# Altium PCB MOD-ADC-10.PCBDOC (part 3 of 4)
Units mm, origin at the board's own origin, x right, y up, seen from the top; angles counter-clockwise.
Board outline 80 x 100 mm, 4 copper layers (L1, P2, L3, L4), stack 1.512 mm thick; 199 components, 170 nets, 717 pads, 298 vias.
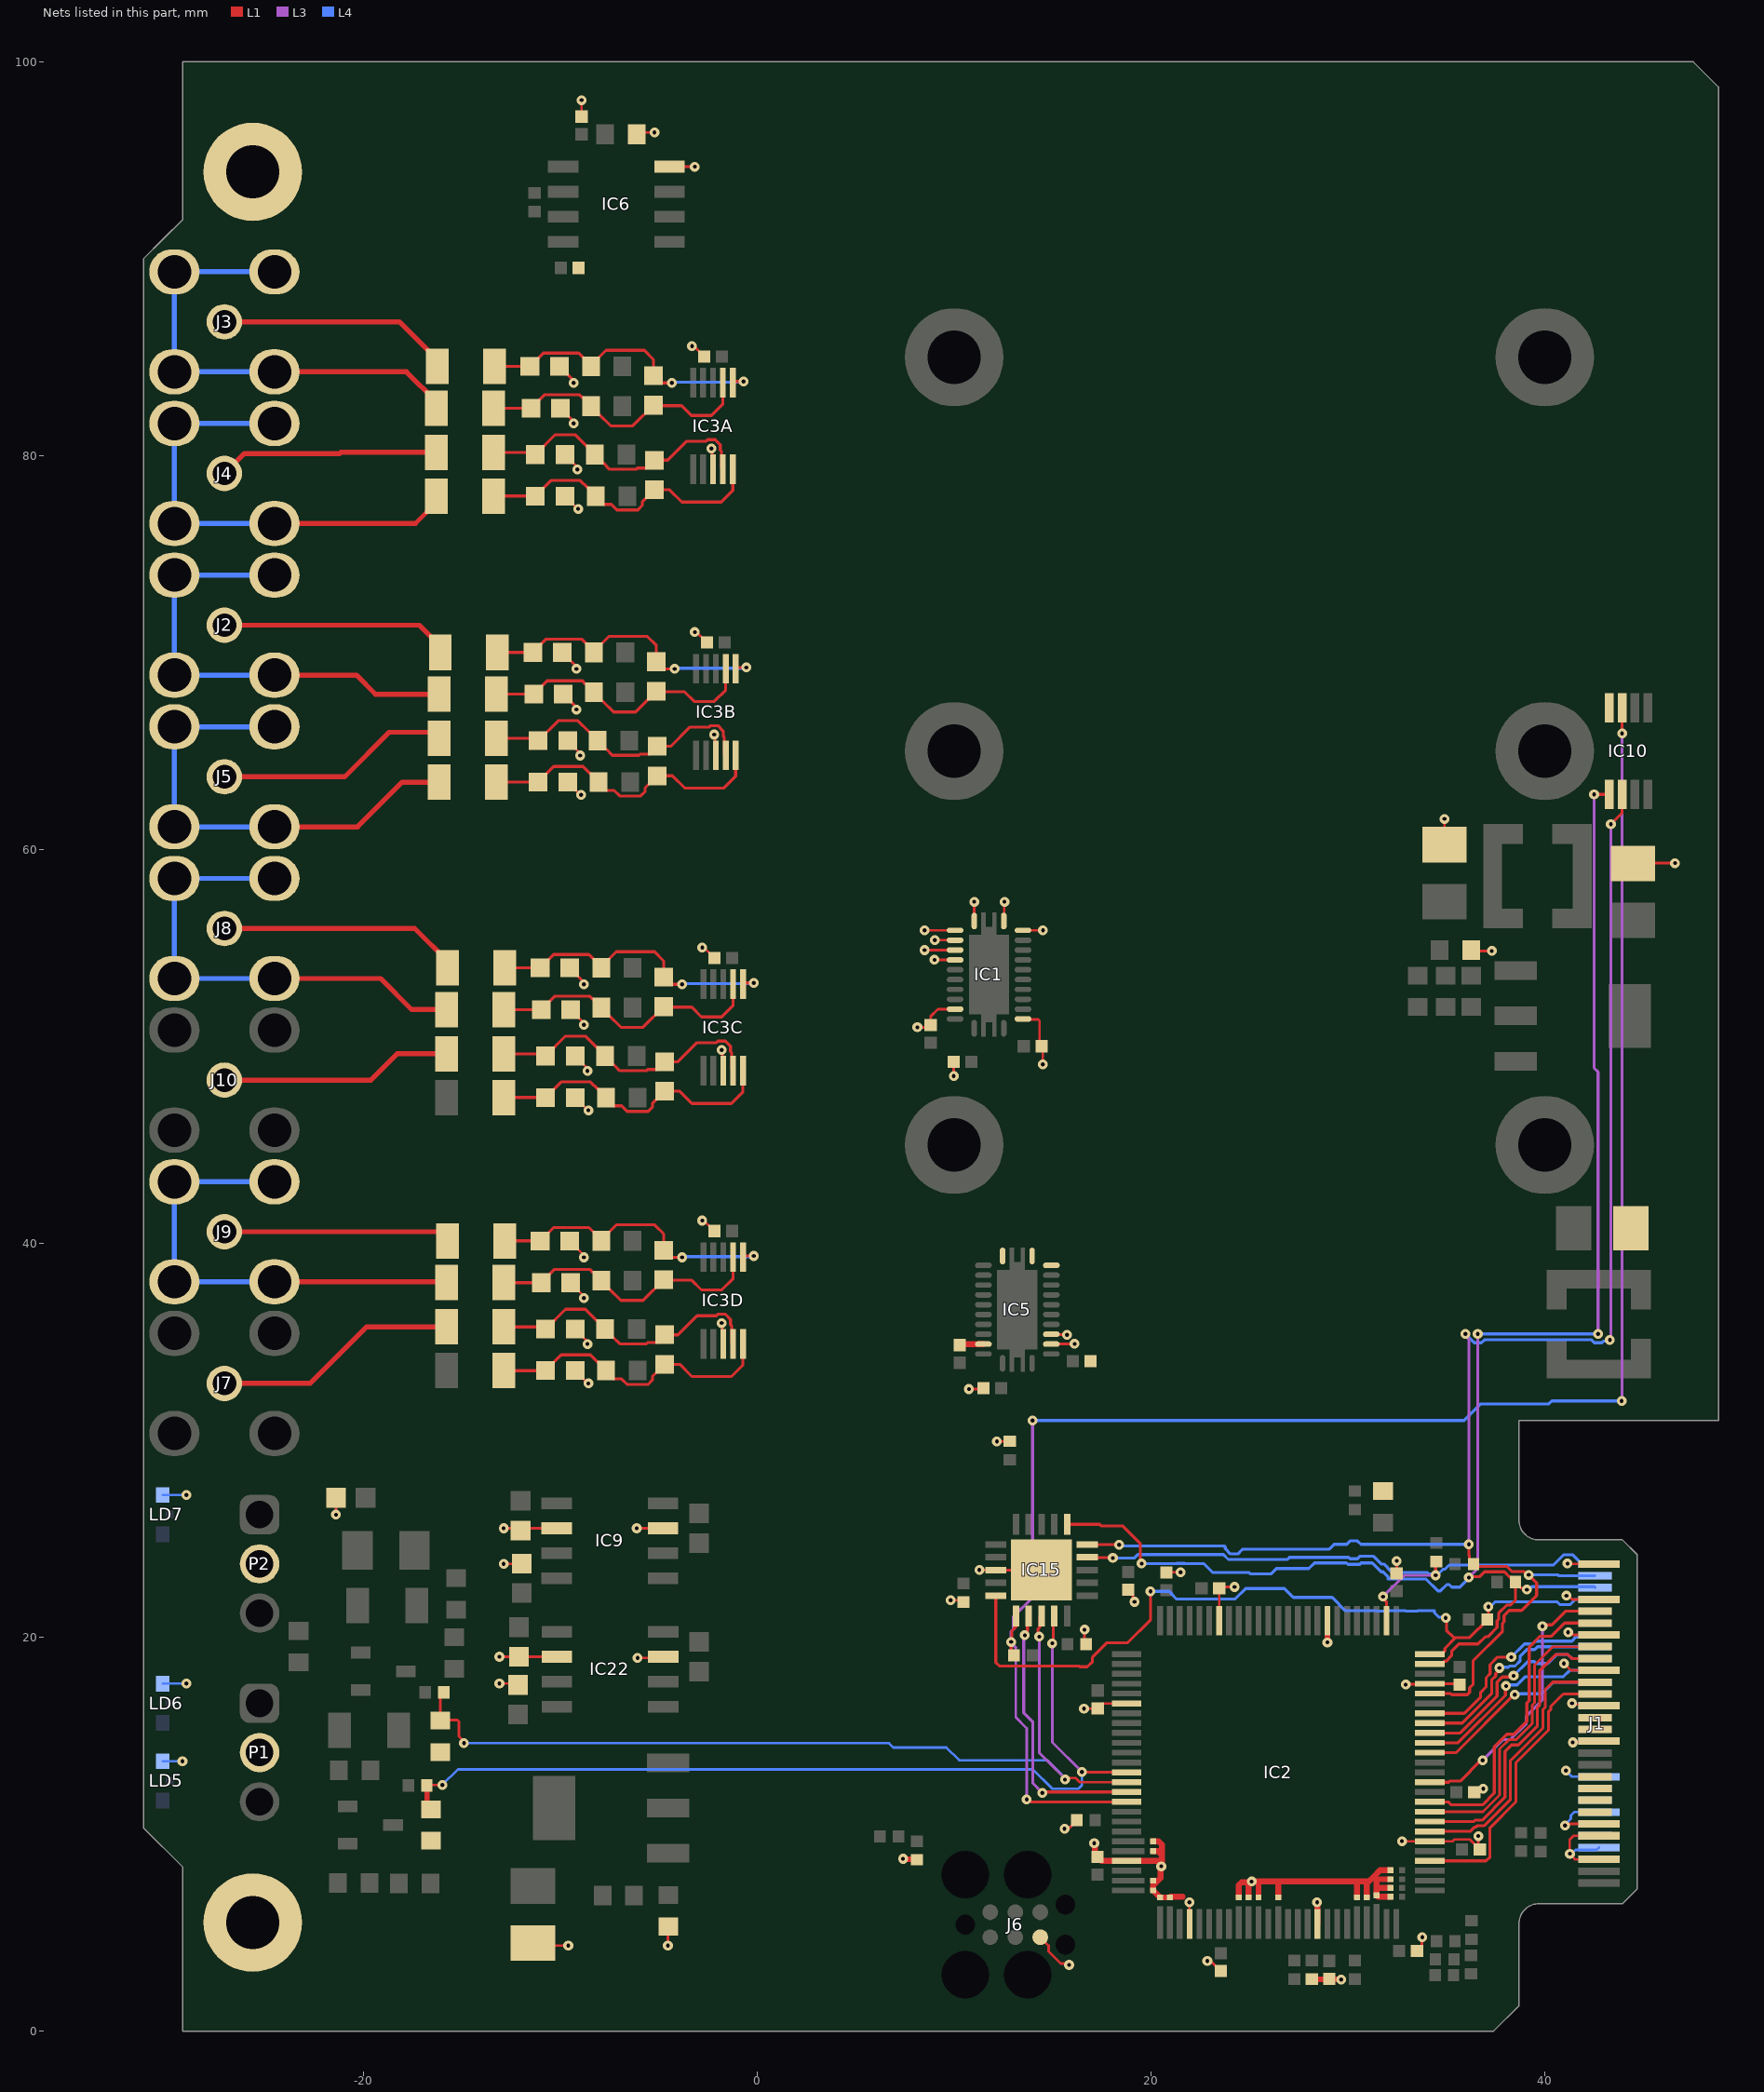
[diagram p4: the nets of this part, all layers, seen from the top]

## Via types
v1: diameter 0.5, hole 0.2, L1 to L4, tented both sides, 290 vias
v2: diameter 0.5, hole 0.2, L1 to L4, 8 vias

## Nets (pads, with @x,y where several pads share a name; then routed paths per layer and width w, separated by ;. In a path a pad name is that pad's centre, name@x,y a point inside that pad or via, vN(x,y) a via of type N, cw(c..) or ccw(c..) an arc to the next point about the centre after c; other vN are vias at no path point) (continued)
GND: (continued)
  L1 w0.3: v2(7.4,8.749) 7.426,8.723 8.071,8.723 R48.2@8.096,8.698 ; C26.1@10.287,34.835 10.327,34.875 11.471,34.875 IC5.22@11.481,34.885 ; v1(17.111,9.539) 17.149,9.501 17.149,8.972 C20.1@17.272,8.85 17.484,8.638 IC2.72@18.754,8.638 20.519,8.638 20.547,8.665 ; NT20.2@20.104,7.638 20.339,7.638 ; NT10.2@20.104,9.138 20.34,9.138 20.547,8.931 ; NT11.2@20.104,9.638 20.371,9.638 20.547,9.462 20.547,8.931 ; NT19.2@21.046,6.788 NT19.2@20.954,6.788 ; 21.604,6.816 20.982,6.816 NT19.2@20.954,6.788 ; v1@21.909,6.576 v1(21.947,6.538) ; NT7.2@24.454,6.788 24.454,7.419 24.592,7.556 24.829,7.556 ; NT6.2@24.954,6.788 24.954,7.431 24.829,7.556 ; NT5.2@25.454,6.788 25.454,7.527 25.522,7.595 ; NT16.2@26.454,6.788 26.454,7.538 26.511,7.595 ; R1.2@28.164,2.638 28.178,2.623 29.637,2.623 v1(29.652,2.609) ; v1(28.429,6.538) 28.454,6.512 IC2.92@28.454,5.438 ; v1(28.954,19.738) IC2.33@28.954,20.838 ; NT15.2@30.454,6.788 30.454,7.595 ; NT14.2@30.954,6.788 30.954,7.595 ; 31.427,7.71 NT2.2@32.154,7.71 ; NT4.2@32.154,6.816 31.533,6.816 NT13.2@31.449,6.899 31.449,7.293 ; NT3.2@32.154,7.266 31.477,7.266 31.449,7.293 ; NT1.2@32.154,8.167 31.629,8.167 31.299,7.837 ; C18.1@36.411,12.128 36.55,12.267 36.833,12.267 v1(36.871,12.305) ; 20.339,7.638 20.477,7.775 20.477,8.329 v1(20.515,8.368) 20.547,8.399 20.547,8.665 ; 20.339,7.638 20.104,7.402 NT9.2@20.104,7.138 NT12.2@20.454,6.788 NT19.2@20.954,6.788 ; 20.547,8.665 20.547,8.931 ; 24.829,7.556 25.066,7.556 v1(25.104,7.595) 25.522,7.595 ; 25.522,7.595 26.511,7.595 ; 26.511,7.595 30.454,7.595 ; 30.454,7.595 31.056,7.595 31.299,7.837 ; 31.299,7.837 31.449,7.687 31.449,7.293
  L4 w0.13: LD5.1@-30.2,13.7 v1(-29.2,13.7) ; LD6.1@-30.2,17.644 v1(-29,17.644) ; LD7.1@-30.2,27.223 v1(-29,27.223) ; v1(41.028,10.437) 41.028,10.492 41.315,10.779 41.315,10.94 41.493,11.118 J1.B22@42.748,11.118 ; v1(41.067,13.229) 41.378,12.918 J1.B19@42.748,12.918 ; v1(41.273,9.004) 41.373,9.004 41.562,9.193 42.623,9.193 J1.B25@42.748,9.318 ; v1(41.382,16.645) 41.445,16.582 42.685,16.582 J1.B13@42.748,16.518 ; v1(41.418,14.659) 41.448,14.689 42.719,14.689 J1.B16@42.748,14.718
HSPI_AD0: IC2.18 J1.B8 | length 10.7
  L1 w0.152: IC2.18@34.154,15.638 35.803,15.638 37.295,17.13 37.295,17.826 37.498,18.029 37.498,18.151 37.694,18.346 v1(37.694,18.44)
  L4 w0.152: v1(37.694,18.44) 37.727,18.474 38.15,18.474 38.211,18.535 38.482,18.535 38.747,18.8 38.747,19.046 39.08,19.379 39.48,19.379 39.619,19.518 J1.B8@42.548,19.518
HSPI_AD1: IC2.17 J1.B9 | length 10.6
  L1 w0.152: IC2.17@34.154,15.138 35.698,15.138 37.574,17.014 37.574,17.71 37.84,17.976 38.345,17.976 v1(38.411,18.042)
  L4 w0.152: v1(38.411,18.042) 39.133,18.763 39.471,18.763 39.566,18.669 40.142,18.669 40.595,19.122 41.172,19.122 41.375,18.918 J1.B9@42.548,18.918
HSPI_AD2: IC2.16 J1.B10 | length 10.2
  L1 w0.152: IC2.16@34.154,14.638 35.593,14.638 37.999,17.044 37.999,17.494 v1(38.027,17.523)
  L4 w0.152: v1(38.027,17.523) 38.087,17.582 38.593,17.582 39.008,17.998 40.94,17.998 41.261,18.318 J1.B10@42.548,18.318
HSPI_AD3: IC2.15 J1.B11 | length 9.9
  L1 w0.152: IC2.15@34.154,14.138 35.487,14.138 38.429,17.079 v1(38.471,17.079)
  L4 w0.152: v1(38.471,17.079) 38.52,17.129 39.853,17.129 40.443,17.718 J1.B11@42.548,17.718
HSPI_CLK: IC2.12 J1.A5 | length 14.4
  L1 w0.152: IC2.12@34.154,12.638 35.113,12.638 35.169,12.694 35.697,12.694 36.753,13.75 v1(36.835,13.75) ; v1(39.876,20.557) 39.943,20.623 40.353,20.623 41.048,21.318 J1.A5@42.548,21.318
  L3 w0.152: v1(36.835,13.75) 37.885,14.801 38.243,14.801 39.056,15.613 39.056,16.003 39.876,16.824 v1(39.876,20.557)
HSPI_CSn: IC2.9 J1.A8 | length 14.9
  L1 w0.13: IC2.9@34.154,11.138 36.859,11.138 37.703,11.982 37.703,14.318 38.186,14.8 38.539,14.8 39.355,15.615 39.355,16.548 39.471,16.665 39.471,18.582 40.407,19.518 J1.A8@42.548,19.518
HSPI_ID: IC2.10 J1.A6 | length 15.8
  L1 w0.152: IC2.10@34.154,11.638 35.095,11.638 35.245,11.488 36.83,11.488 37.435,12.093 37.435,14.429 38.074,15.068 38.428,15.068 39.086,15.727 39.086,16.659 39.203,16.776 39.203,19.497 39.759,20.053 40.343,20.053 41.008,20.718 J1.A6@42.548,20.718
HSPI_Q: IC2.8 J1.A9 | length 14.9
  L1 w0.152: IC2.8@34.154,10.638 36.392,10.638 36.463,10.708 36.809,10.708 37.972,11.871 37.972,14.207 38.297,14.532 38.65,14.532 39.623,15.504 39.623,16.437 39.74,16.554 39.74,18.311 40.55,19.122 41.172,19.122 41.375,18.918 J1.A9@42.548,18.918
HSPI_sAD0: IC2.4 J1.A12 | length 14.6
  L1 w0.152: IC2.4@34.154,8.638 37.011,8.638 37.209,8.835 37.209,10.318 38.53,11.639 38.53,13.622 40.181,15.273 40.181,16.206 40.298,16.322 40.298,16.478 40.938,17.118 J1.A12@42.548,17.118
HSPI_sAD1: IC2.7 J1.A11 | length 13.8
  L1 w0.152: IC2.7@34.154,10.138 36.209,10.138 36.43,10.358 36.508,10.358 36.578,10.429 36.925,10.429 38.251,11.755 38.251,13.738 39.902,15.389 39.902,16.321 40.019,16.438 40.019,17.334 40.403,17.718 J1.A11@42.548,17.718
IN1A_N: J3.2 J3.3 J3.4 J3.5 R14A.1 | length 24.4
  L1 w0.254: J3.3@-24.528,84.26 -17.82,84.26 -16.3,82.74 R14A.1@-16.3,82.415
  L4 w0.254: J3.3@-24.528,84.26 J3.4@-29.608,84.26 J3.5@-29.608,89.34 J3.2@-24.528,89.34
IN1B_N: J2.2 J2.3 J2.4 J2.5 R14B.1 | length 24
  L1 w0.254: J2.3@-24.528,68.856 -20.367,68.856 -19.4,67.889 R14B.1@-16.156,67.889
  L4 w0.254: J2.3@-24.528,68.856 J2.4@-29.608,68.856 J2.5@-29.608,73.936 J2.2@-24.528,73.936
IN1C_N: J8.2 J8.3 J8.4 J8.5 R14C.1 | length 24.6
  L1 w0.254: J8.3@-24.528,53.453 -19.139,53.453 -17.557,51.872 R14C.1@-15.781,51.872
  L4 w0.254: J8.3@-24.528,53.453 J8.4@-29.608,53.453 J8.5@-29.608,58.533 J8.2@-24.528,58.533
IN1D_N: J9.2 J9.3 J9.4 J9.5 R14D.1 | length 24
  L1 w0.254: J9.3@-24.528,38.049 -15.826,38.049 R14D.1@-15.781,38.004
  L4 w0.254: J9.3@-24.528,38.049 J9.4@-29.608,38.049 J9.5@-29.608,43.129 J9.2@-24.528,43.129
IN2A_N: J4.2 J4.3 J4.4 J4.5 R6A.1 | length 24.2
  L1 w0.254: J4.3@-24.528,76.558 -17.367,76.558 -16.3,77.625 R6A.1@-16.3,77.95
  L4 w0.254: J4.3@-24.528,76.558 J4.4@-29.608,76.558 J4.5@-29.608,81.638 J4.2@-24.528,81.638
IN2B_N: J5.2 J5.3 J5.4 J5.5 R6B.1 | length 24.6
  L1 w0.254: J5.3@-24.528,61.155 -20.302,61.155 -18.032,63.424 R6B.1@-16.156,63.424
  L4 w0.254: J5.3@-24.528,61.155 J5.4@-29.608,61.155 J5.5@-29.608,66.235 J5.2@-24.528,66.235